# Altium PCB PCB-Mezzanine.PcbDoc (part 2 of 2)
Units mm, origin at the board's own origin, x right, y up, seen from the top; angles counter-clockwise.
Board outline 133.2 x 100 mm, 6 copper layers (Top Layer, Mid-Layer 1, Mid-Layer 2, Mid-Layer 3, Mid-Layer 4, Bottom Layer); 39 components, 252 nets, 1606 pads, 142 vias.
Unrouted connection lines stored in the file: 49.
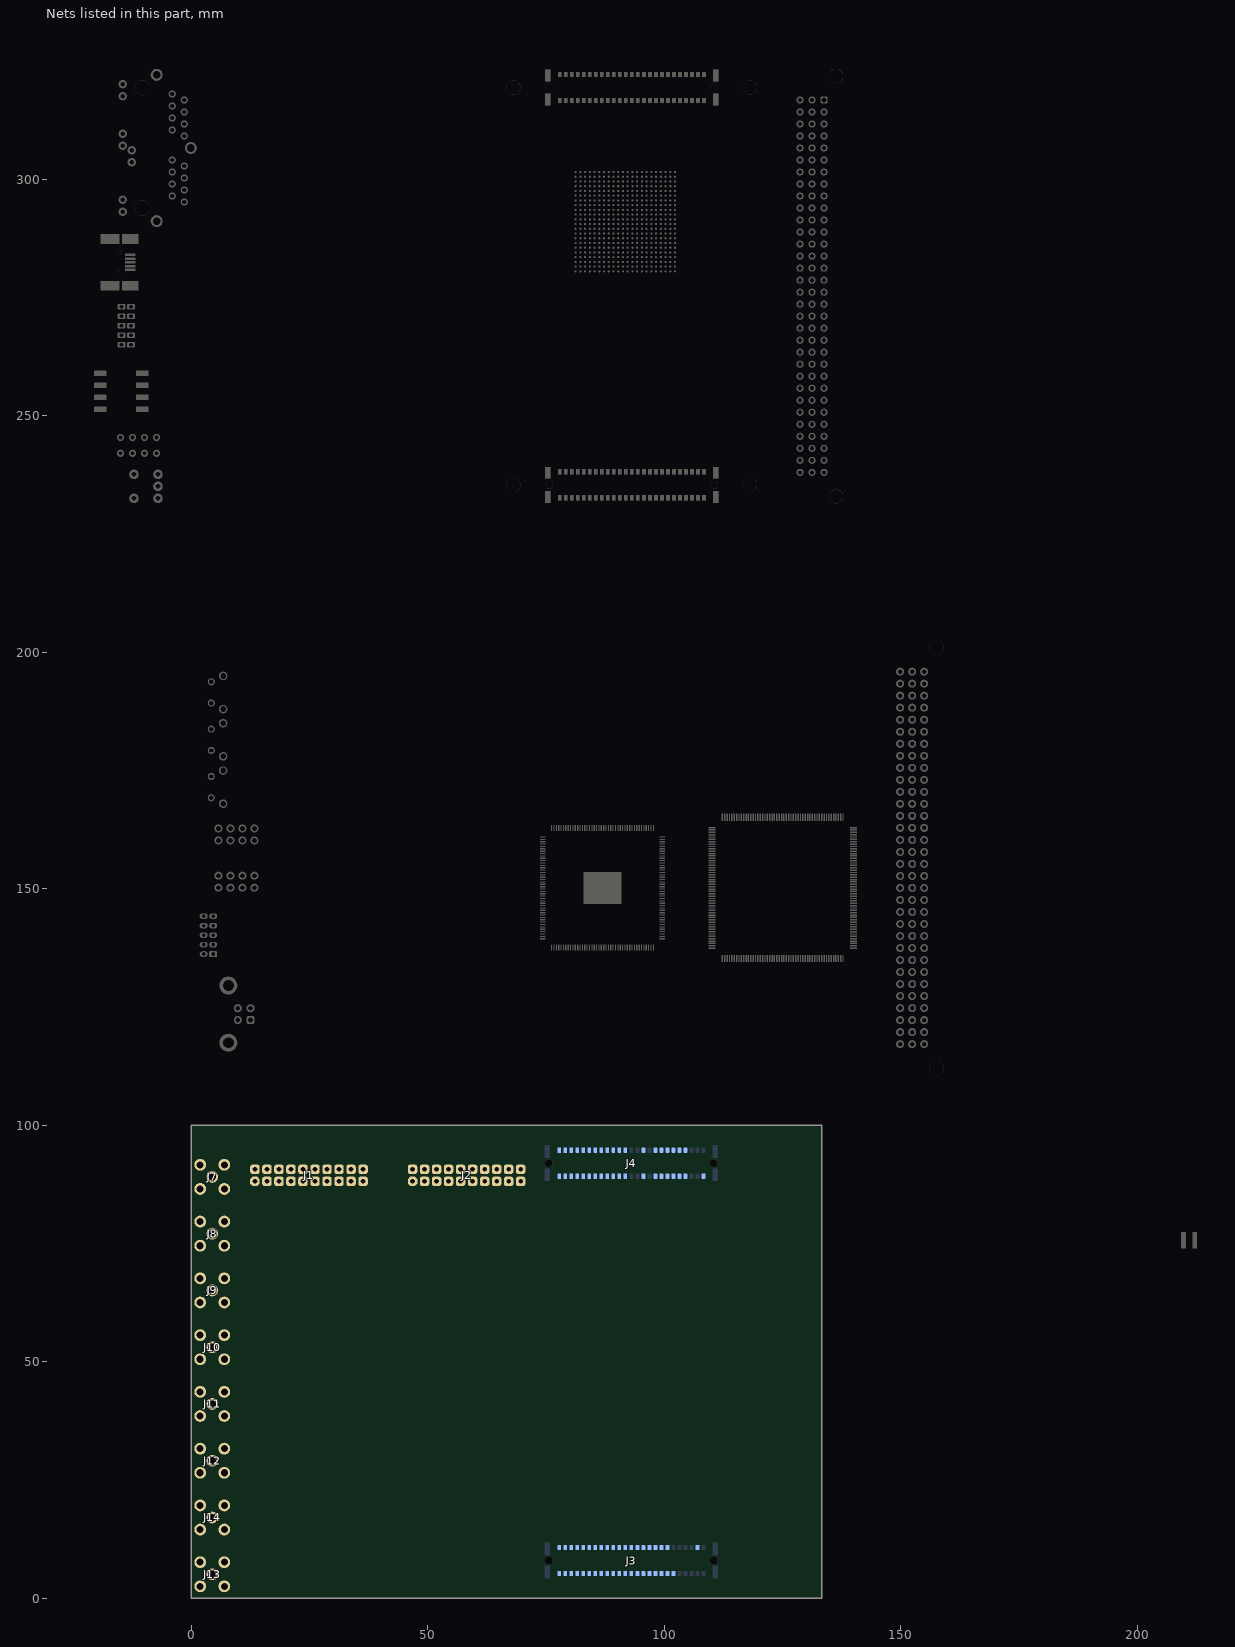
[diagram p6: the nets of this part, all layers, seen from the top]

## Part data
J1 J2: library part FlatCable2x10, "FlatCable2x10", Manufacturer="Wurth Elektronik", Mouser No.=710-61202021621
J2_1 J4_1: "Connecteur Smd serie SMC pas 1.27 ERNI - Distrelec 12 06 39"
J3 J4: "Male 1.27 pitch 2x25 pin connector"
J3_1 J5: "Connecteur Smd serie SMC pas 1.27 ERNI - Distrelec 12 06 42"
J5_1: library part "DIN41612 MALE 3X32 ABC R90", "DIN41612 MALE 3X32 ABC R90", Manufacturer=Harting, Mouser No.=617-09-03-196-6921
J6_1: library part "USB-B-TH-AMPHENOL UE27-BC54-130", "USB-B-TH-AMPHENOL UE27-BC54-130", Manufacturer="Amphenol ICC", Mouser No.=523-UE27-BC54-130
J7 J8 J9 J10 J11 J12 J13 J14: library part "SMA TH RIGHT ANGLE LINX CONSMA002", "SMA TH RIGHT ANGLE LINX CONSMA002", Manufacturer="Linx Technologies", Mouser No.=712-CONSMA002-G
J7_1: library part FlatCable2x5, "FlatCable2x5", Manufacturer="Amphenol FCI", Mouser No.=649-98464-G6110ULF
J9_1: "Integrated connector modules 10/100 base-TX belMag with LEDs .  Reselec N° 0810-1X1T-03"
J10_1: "Farnell no 1125-348 / Molex SD-67503-010"
LD2: "LED Schurter - Distrelec 25 09 08..."
LD4 LD5: library part "LED Dialight 568-0721-111F", "LED Dialight 568-0721-111F", Manufacturer=Dialight, Mouser No.=645-568-0721-111F
S1: "ITW Switches JPM 1990-0101 / Distrelec 20 15 40"
S2 S3 S4: library part "Push Button 2Pins", "Push Button, 2 pins", Manufacturer="TE Connectivity / Alcoswitch", Mouser No.=506-FSMRA4JH04
SW1: "Dip switch smd 4 poles - Thomas & Betts - Distrelec 21 04 21"
U1_1: library part TMS320F28377S-176P, "TMS320F28377S-176P", Manufacturer="Texas Instruments", Mouser No.=595-MS320F28377SPTPT
U8_1: library part XC2C256-PQFP208, "XC2C256 CoolRunner-II CPLD", Manufacturer=Xilinx, Digikey No.=122-1411-ND

## Via types
v1: diameter 0.55, hole 0.15, Top Layer to Bottom Layer, 100 vias
v2: diameter 0.7, hole 0.3, Top Layer to Bottom Layer, tented both sides, 42 vias

## Nets (pads, with @x,y where several pads share a name; then routed paths per layer and width w, separated by ;. In a path a pad name is that pad's centre, name@x,y a point inside that pad or via, vN(x,y) a via of type N, cw(c..) or ccw(c..) an arc to the next point about the centre after c; other vN are vias at no path point)
3VREFF: 
+3V3_A: 
+3V3_D: J3.a7 J3.b7 J4.a1 J4.b1
+5V: J3.a1 J3.b1 J4.a25
\S\P\I\A\_\S\T\E\: J4.a2
\S\P\I\B\_\S\T\E\: J4.b3
\S\P\I\C\_\S\T\E\: J4.a11
\S\P\I\C\_\S\T\E\_\+\: 
\S\P\I\C\_\S\T\E\_\-\: 
ADC_CH0: 
ADC_CH0_CS: J3.a11
ADC_CH0_SDO: J3.a2
ADC_CH1: 
ADC_CH1_CS: J3.b11
ADC_CH1_SDO: J3.b2
ADC_CH2: 
ADC_CH2_CS: J3.a12
ADC_CH2_SDO: J3.a3
ADC_CH3: 
ADC_CH3_CS: J3.b12
ADC_CH3_SDO: J3.b3
ADC_CH4: 
ADC_CH4_CS: J3.a13
ADC_CH4_SDO: J3.a4
ADC_CH5: 
ADC_CH5_CS: J3.b13
ADC_CH5_SDO: J3.b4
ADC_CH6: 
ADC_CH6_CS: J3.a14
ADC_CH6_SDO: J3.a5
ADC_CH7: 
ADC_CH7_CS: J3.b14
ADC_CH7_SDO: J3.b5
ADC_CH8: 
ADC_CH8_CS: J3.a15
ADC_CH8_SDO: J3.a6
ADC_CH9: 
ADC_CH9_CS: J3.b15
ADC_CH9_SDO: J3.b6
ADC_CH10: 
ADC_CH10_CS: J3.a16
ADC_CH10_SDO: J4.a18
ADC_CH11: 
ADC_CH11_CS: J3.b16
ADC_CH11_SDO: J4.b18
ADC_CH12: 
ADC_CH12_CS: J3.a17
ADC_CH12_SDO: J4.a19
ADC_CH13: 
ADC_CH13_CS: J3.b17
ADC_CH13_SDO: J4.b19
ADC_CH14: 
ADC_CH14_CS: J3.a18
ADC_CH14_SDO: J4.a20
ADC_CH15: 
ADC_CH15_CS: J3.b18
ADC_CH15_SDO: J4.b20
ADC_CH16: 
ADC_CH16_CS: J3.a8
ADC_CH16_SDO: J4.a21
ADC_CH17: 
ADC_CH17_CS: J3.b8
ADC_CH17_SDO: J4.b21
ADC_CH18: 
ADC_CH18_CS: J3.a9
ADC_CH18_SDO: J4.a22
ADC_CH19: 
ADC_CH19_CS: J3.b9
ADC_CH19_SDO: J4.b22
ADC_SCLK: J3.a20
DAC_A: 
DAC_B: 
DAC_C: 
DAC_D: 
DAC_E: 
DAC_F: 
DAC_G: 
DAC_H: 
DAC_OUT_A: J7.1
DAC_OUT_B: J8.1
DAC_OUT_C: J9.1
DAC_OUT_D: J10.1
DAC_OUT_E: J11.1
DAC_OUT_F: J12.1
DAC_OUT_G: J13.1
DAC_OUT_H: J14.1
GND_A: 
GND_D: J3.a10 J3.a19 J3.b10 J3.b19 J3.b24 J4.a5 J4.a12 J4.a15 J4.a17 J4.b5 J4.b12 J4.b15 J4.b17 J7.2 J8.2 J9.2 J10.2 J11.2 J12.2 J13.2 J14.2
MEAS_0_N: J1.1
MEAS_0_P: J1.2
MEAS_1_N: J1.3
MEAS_1_P: J1.4
MEAS_2_N: J1.5
MEAS_2_P: J1.6
MEAS_3_N: J1.7
MEAS_3_P: J1.8
MEAS_4_N: J1.9
MEAS_4_P: J1.10
MEAS_5_N: J1.11
MEAS_5_P: J1.12
MEAS_6_N: J1.13
MEAS_6_P: J1.14
MEAS_7_N: J1.15
MEAS_7_P: J1.16
MEAS_8_N: J1.17
MEAS_8_P: J1.18
MEAS_9_N: J1.19
MEAS_9_P: J1.20
MEAS_10_N: J2.1
MEAS_10_P: J2.2
MEAS_11_N: J2.3
MEAS_11_P: J2.4
MEAS_12_N: J2.5
MEAS_12_P: J2.6
MEAS_13_N: J2.7
MEAS_13_P: J2.8
MEAS_14_N: J2.9
MEAS_14_P: J2.10
MEAS_15_N: J2.11
MEAS_15_P: J2.12
MEAS_16_N: J2.13
MEAS_16_P: J2.14
MEAS_17_N: J2.15
MEAS_17_P: J2.16
MEAS_18_N: J2.17
MEAS_18_P: J2.18
MEAS_19_N: J2.19
MEAS_19_P: J2.20
NetC1_1: 
NetC1_2: 
NetC2_1: 
NetC2_2: 
NetC3_1: 
NetC3_2: 
NetC7_2: 
NetC8_2: 
NetC9_2: 
NetC10_1: 
NetC10_2: 
NetC11_1: 
NetC11_2: 
NetC12_1: 
NetC12_2: 
NetC16_2: 
NetC17_2: 
NetC18_2: 
NetC19_1: 
NetC19_2: 
NetC20_1: 
NetC20_2: 
NetC21_1: 
NetC21_2: 
NetC25_2: 
NetC26_2: 
NetC27_2: 
NetC28_1: 
NetC28_2: 
NetC29_1: 
NetC29_2: 
NetC30_1: 
NetC30_2: 
NetC34_2: 
NetC35_2: 
NetC36_2: 
NetC40_1: 
NetC40_2: 
NetC41_1: 
NetC41_2: 
NetC44_2: 
NetC45_2: 
NetC46_1: 
NetC46_2: 
NetC47_1: 
NetC47_2: 
NetC51_2: 
NetC52_2: 
NetC54_1: 
NetC54_2: 
NetC55_1: 
NetC55_2: 
NetC58_2: 
NetC59_2: 
NetC60_1: 
NetC60_2: 
NetC61_1: 
NetC61_2: 
NetC64_2: 
NetC65_2: 
NetC109_1: 
NetC110_2: 
NetC112_1: 
NetC113_2: 
NetC115_2: 
NetC116_1: 
NetC118_2: 
NetC119_1: 
NetC120_2: 
NetC121_1: 
NetC122_2: 
NetC123_1: 
NetC124_2: 
NetC126_2: 
NetC128_1: 
NetC130_2: 
NetC131_1: 
NetC132_2: 
NetC136_2: 
NetC140_1: 
NetC140_2: 
NetC141_2: 
NetJP1_2: 
NetJP2_2: 
NetJP3_2: 
NetJP4_2: 
NetJP5_2: 
NetJP6_2: 
NetJP7_2: 
NetJP8_2: 
NetJP9_2: 
NetJP10_2: 
NetJP11_2: 
NetJP12_2: 
NetJP13_2: 
NetJP14_2: 
NetJP15_2: 
NetJP16_2: 
NetJP17_2: 
NetJP18_2: 
NetJP19_2: 
NetJP20_2: 
NetR142_1: 
NetU35_6: 
REF_1V5: 
SCIC_RX: J4.a10
SCIC_TX: J4.b9
Spare_0: J4.a6
Spare_1: J4.b6
Spare_2: J4.a7
Spare_3: J4.b7
Spare_4: J4.a8
Spare_5: J4.b8
Spare_6: J4.a9
SPIA_CLK: J4.a3
SPIA_SIMO: J4.b2
SPIB_CLK: J4.b4
SPIB_SIMO: J4.a4
SPIC_CLK: J4.b10
SPIC_CLK_+: 
SPIC_CLK_-: 
SPIC_SIMO: J4.b11
SPIC_SIMO_+: 
SPIC_SIMO_-: 
pads on no net: 1.1 2.1 3.1 4.1 Designator24.1 Designator24.2 J1_1.1 J1_1.2 J1_1.3 J1_1.4 J1_1.5 J1_1.6 J1_1.7 J1_1.8 J1_1.9 J1_1.10 J2_1.51 J2_1.52 J2_1.53 J2_1.54 J2_1.55 J2_1.56 J2_1.a1 J2_1.a2 J2_1.a3 J2_1.a4 J2_1.a5 J2_1.a6 J2_1.a7 J2_1.a8 J2_1.a9 J2_1.a10 J2_1.a11 J2_1.a12 J2_1.a13 J2_1.a14 J2_1.a15 J2_1.a16 J2_1.a17 J2_1.a18 J2_1.a19 J2_1.a20 J2_1.a21 J2_1.a22 J2_1.a23 J2_1.a24 J2_1.a25 J2_1.b1 J2_1.b2 J2_1.b3 J2_1.b4 J2_1.b5 J2_1.b6 J2_1.b7 J2_1.b8 J2_1.b9 J2_1.b10 J2_1.b11 J2_1.b12 J2_1.b13 J2_1.b14 J2_1.b15 J2_1.b16 J2_1.b17 J2_1.b18 J2_1.b19 J2_1.b20 J2_1.b21 J2_1.b22 J2_1.b23 J2_1.b24 J2_1.b25 J3.0 J3.a21 J3.a22 J3.a23 J3.a24 J3.a25 J3.b20 J3.b21 J3.b22 J3.b23 J3.b25 J3_1.51 J3_1.52 J3_1.53 J3_1.54 J3_1.55 J3_1.56 J3_1.a1 J3_1.a2 J3_1.a3 J3_1.a4 J3_1.a5 J3_1.a6 J3_1.a7 J3_1.a8 J3_1.a9 J3_1.a10 J3_1.a11 J3_1.a12 J3_1.a13 J3_1.a14 J3_1.a15 J3_1.a16 J3_1.a17 J3_1.a18 J3_1.a19 J3_1.a20 J3_1.a21 J3_1.a22 J3_1.a23 J3_1.a24 J3_1.a25 J3_1.b1 J3_1.b2 J3_1.b3 J3_1.b4 J3_1.b5 J3_1.b6 J3_1.b7 J3_1.b8 J3_1.b9 J3_1.b10 J3_1.b11 J3_1.b12 J3_1.b13 J3_1.b14 J3_1.b15 J3_1.b16 J3_1.b17 J3_1.b18 J3_1.b19 J3_1.b20 J3_1.b21 J3_1.b22 J3_1.b23 J3_1.b24 J3_1.b25 J4.0 J4.a13 J4.a14 J4.a16 J4.a23 J4.a24 J4.b13 J4.b14 J4.b16 J4.b23 J4.b24 J4.b25 J4_1.51 J4_1.52 J4_1.53 J4_1.54 J4_1.55 J4_1.56 J4_1.a1 J4_1.a2 J4_1.a3 J4_1.a4 J4_1.a5 J4_1.a6 J4_1.a7 J4_1.a8 J4_1.a9 J4_1.a10 J4_1.a11 J4_1.a12 J4_1.a13 J4_1.a14 J4_1.a15 J4_1.a16 J4_1.a17 J4_1.a18 J4_1.a19 J4_1.a20 J4_1.a21 J4_1.a22 J4_1.a23 J4_1.a24 J4_1.a25 J4_1.b1 J4_1.b2 J4_1.b3 J4_1.b4 J4_1.b5 J4_1.b6 J4_1.b7 J4_1.b8 J4_1.b9 J4_1.b10 J4_1.b11 J4_1.b12 J4_1.b13 J4_1.b14 J4_1.b15 J4_1.b16 J4_1.b17 J4_1.b18 J4_1.b19 J4_1.b20 J4_1.b21 J4_1.b22 J4_1.b23 J4_1.b24 J4_1.b25 J5.51 J5.52 J5.53 J5.54 J5.55 J5.56 J5.a1 J5.a2 J5.a3 J5.a4 J5.a5 J5.a6 J5.a7 J5.a8 J5.a9 J5.a10 J5.a11 J5.a12 J5.a13 J5.a14 J5.a15 J5.a16 J5.a17 J5.a18 J5.a19 J5.a20 J5.a21 J5.a22 J5.a23 J5.a24 J5.a25 J5.b1 J5.b2 J5.b3 J5.b4 J5.b5 J5.b6 J5.b7 J5.b8 J5.b9 J5.b10 J5.b11 J5.b12 J5.b13 J5.b14 J5.b15 J5.b16 J5.b17 J5.b18 J5.b19 J5.b20 J5.b21 J5.b22 J5.b23 J5.b24 J5.b25 J5_1.0 J5_1.A1 J5_1.A2 J5_1.A3 J5_1.A4 J5_1.A5 J5_1.A6 J5_1.A7 J5_1.A8 J5_1.A9 J5_1.A10 J5_1.A11 J5_1.A12 J5_1.A13 J5_1.A14 J5_1.A15 J5_1.A16 J5_1.A17 J5_1.A18 J5_1.A19 J5_1.A20 J5_1.A21 J5_1.A22 J5_1.A23 J5_1.A24 J5_1.A25 J5_1.A26 J5_1.A27 J5_1.A28 J5_1.A29 J5_1.A30 J5_1.A31 J5_1.A32 J5_1.B1 J5_1.B2 J5_1.B3 J5_1.B4 J5_1.B5 J5_1.B6 J5_1.B7 J5_1.B8 J5_1.B9 J5_1.B10 J5_1.B11 J5_1.B12 J5_1.B13 J5_1.B14 J5_1.B15 J5_1.B16 J5_1.B17 J5_1.B18 J5_1.B19 J5_1.B20 J5_1.B21 J5_1.B22 J5_1.B23 J5_1.B24 J5_1.B25 J5_1.B26 J5_1.B27 J5_1.B28 J5_1.B29 J5_1.B30 J5_1.B31 J5_1.B32 J5_1.C1 J5_1.C2 J5_1.C3 J5_1.C4 J5_1.C5 J5_1.C6 J5_1.C7 J5_1.C8 J5_1.C9 J5_1.C10 J5_1.C11 J5_1.C12 J5_1.C13 J5_1.C14 J5_1.C15 J5_1.C16 J5_1.C17 J5_1.C18 J5_1.C19 J5_1.C20 J5_1.C21 J5_1.C22 J5_1.C23 J5_1.C24 J5_1.C25 J5_1.C26 J5_1.C27 J5_1.C28 J5_1.C29 J5_1.C30 J5_1.C31 J5_1.C32 J6_1.1 J6_1.2 J6_1.3 J6_1.4 J6_1.5 J6_1.6 J7_1.1 J7_1.2 J7_1.3 J7_1.4 J7_1.5 J7_1.6 J7_1.7 J7_1.8 J7_1.9 J7_1.10 J8_1.1a J8_1.1b J8_1.1c J8_1.2a J8_1.2b J8_1.2c J8_1.3a J8_1.3b J8_1.3c J8_1.4a J8_1.4b J8_1.4c J8_1.5a J8_1.5b J8_1.5c J8_1.6a J8_1.6b J8_1.6c J8_1.7a J8_1.7b J8_1.7c J8_1.8a J8_1.8b J8_1.8c J8_1.9a J8_1.9b J8_1.9c J8_1.10a J8_1.10b J8_1.10c J8_1.11a J8_1.11b J8_1.11c J8_1.12a J8_1.12b J8_1.12c J8_1.13a J8_1.13b J8_1.13c J8_1.14a J8_1.14b J8_1.14c J8_1.15a J8_1.15b J8_1.15c J8_1.16a J8_1.16b J8_1.16c J8_1.17a J8_1.17b J8_1.17c J8_1.18a J8_1.18b J8_1.18c J8_1.19a J8_1.19b J8_1.19c J8_1.20a J8_1.20b J8_1.20c J8_1.21a J8_1.21b J8_1.21c J8_1.22a J8_1.22b J8_1.22c J8_1.23a J8_1.23b J8_1.23c J8_1.24a J8_1.24b J8_1.24c J8_1.25a J8_1.25b J8_1.25c J8_1.26a J8_1.26b J8_1.26c J8_1.27a J8_1.27b J8_1.27c J8_1.28a J8_1.28b J8_1.28c J8_1.29a J8_1.29b J8_1.29c J8_1.30a J8_1.30b J8_1.30c J8_1.31a J8_1.31b J8_1.31c J8_1.32a J8_1.32b J8_1.32c J8_1.97 J8_1.98 J9_1.1 J9_1.2 J9_1.3 J9_1.4 J9_1.5 J9_1.6 J9_1.7 J9_1.8 J9_1.9 J9_1.10 J9_1.11 J9_1.12 J9_1.13 J9_1.14 J9_1.15 J9_1.16 J9_1.17 J9_1.18 J9_1.19 J9_1.20 J9_1.21 J9_1.22 J9_1.23 J9_1.24 J9_1.25 J9_1.26 J9_1.27 J9_1.28 J9_1.29 J10_1.1 J10_1.2 J10_1.3 J10_1.4 J10_1.5 J10_1.6 J10_1.7 J10_1.8 J10_1.9 J10_1.10 J10_1.11 LD2.1 LD2.2 LD2.3 LD2.4 LD2.5 LD2.6 LD2.7 LD2.8 LD4.1 LD4.2 LD4.3 LD4.4 LD4.5 LD4.6 LD4.7 LD4.8 LD5.1 LD5.2 LD5.3 LD5.4 LD5.5 LD5.6 LD5.7 LD5.8 S1.4 S1.5 S1.C S1.NC S1.NO S2.0 S2.1 S2.2 S3.0 S3.1 S3.2 S4.0 S4.1 S4.2 SW1.1 SW1.2 SW1.3 SW1.4 SW1.5 SW1.6 SW1.7 SW1.8 U1_1.0 U1_1.1 U1_1.2 U1_1.3 U1_1.4 U1_1.5 U1_1.6 U1_1.7 U1_1.8 U1_1.9 U1_1.10 U1_1.11 U1_1.12 U1_1.13 U1_1.14 U1_1.15 U1_1.16 U1_1.17 U1_1.18 U1_1.19 U1_1.20 U1_1.21 U1_1.22 U1_1.23 U1_1.24 U1_1.25 U1_1.26 U1_1.27 U1_1.28 U1_1.29 U1_1.30 U1_1.31 U1_1.32 U1_1.33 U1_1.34 U1_1.35 U1_1.36 U1_1.37 U1_1.38 U1_1.39 U1_1.40 U1_1.41 U1_1.42 U1_1.43 U1_1.44 U1_1.45 U1_1.46 U1_1.47 U1_1.48 U1_1.49 U1_1.50 U1_1.51 U1_1.52 U1_1.53 U1_1.54 U1_1.55 U1_1.56 U1_1.57 U1_1.58 U1_1.59 U1_1.60 U1_1.61 U1_1.62 U1_1.63 U1_1.64 U1_1.65 U1_1.66 U1_1.67 U1_1.68 U1_1.69 U1_1.70 U1_1.71 U1_1.72 U1_1.73 U1_1.74 U1_1.75 U1_1.76 U1_1.77 U1_1.78 U1_1.79 U1_1.80 U1_1.81 U1_1.82 U1_1.83 U1_1.84 U1_1.85 U1_1.86 U1_1.87 U1_1.88 U1_1.89 U1_1.90 U1_1.91 U1_1.92 U1_1.93 U1_1.94 U1_1.95 U1_1.96 U1_1.97 U1_1.98 U1_1.99 U1_1.100 U1_1.101 U1_1.102 U1_1.103 U1_1.104 U1_1.105 U1_1.106 U1_1.107 U1_1.108 U1_1.109 U1_1.110 U1_1.111 U1_1.112 U1_1.113 U1_1.114 U1_1.115 U1_1.116 U1_1.117 U1_1.118 U1_1.119 U1_1.120 U1_1.121 U1_1.122 U1_1.123 U1_1.124 U1_1.125 U1_1.126 U1_1.127 U1_1.128 U1_1.129 U1_1.130 U1_1.131 U1_1.132 U1_1.133 U1_1.134 U1_1.135 U1_1.136 U1_1.137 U1_1.138 U1_1.139 U1_1.140 U1_1.141 U1_1.142 U1_1.143 U1_1.144 U1_1.145 U1_1.146 U1_1.147 U1_1.148 U1_1.149 U1_1.150 U1_1.151 U1_1.152 U1_1.153 U1_1.154 U1_1.155 U1_1.156 U1_1.157 U1_1.158 U1_1.159 U1_1.160 U1_1.161 U1_1.162 U1_1.163 U1_1.164 U1_1.165 U1_1.166 U1_1.167 U1_1.168 U1_1.169 U1_1.170 U1_1.171 U1_1.172 U1_1.173 U1_1.174 U1_1.175 U1_1.176 U3.A1 U3.A2 U3.A3 U3.A4 U3.A5 U3.A6 U3.A7 U3.A8 U3.A9 U3.A10 U3.A11 U3.A12 U3.A13 U3.A14 U3.A15 U3.A16 U3.A17 U3.A18 U3.A19 U3.A20 U3.A21 U3.A22 U3.AA1 U3.AA2 U3.AA3 U3.AA4 U3.AA5 U3.AA6 U3.AA7 U3.AA8 U3.AA9 U3.AA10 U3.AA11 U3.AA12 U3.AA13 U3.AA14 U3.AA15 U3.AA16 U3.AA17 U3.AA18 U3.AA19 U3.AA20 U3.AA21 U3.AA22 U3.AB1 U3.AB2 U3.AB3 U3.AB4 U3.AB5 U3.AB6 U3.AB7 U3.AB8 U3.AB9 U3.AB10 U3.AB11 U3.AB12 U3.AB13 U3.AB14 U3.AB15 U3.AB16 U3.AB17 U3.AB18 U3.AB19 U3.AB20 U3.AB21 U3.AB22 U3.B1 U3.B2 U3.B3 U3.B4 U3.B5 U3.B6 U3.B7 U3.B8 U3.B9 U3.B10 U3.B11 U3.B12 U3.B13 U3.B14 U3.B15 U3.B16 U3.B17 U3.B18 U3.B19 U3.B20 U3.B21 U3.B22 U3.C1 U3.C2 U3.C3 U3.C4 U3.C5 U3.C6 U3.C7 U3.C8 U3.C9 U3.C10 U3.C11 U3.C12 U3.C13 U3.C14 U3.C15 U3.C16 U3.C17 U3.C18 U3.C19 U3.C20 U3.C21 U3.C22 U3.D1 U3.D2 U3.D3 U3.D4 U3.D5 U3.D6 U3.D7 U3.D8 U3.D9 U3.D10 U3.D11 U3.D12 U3.D13 U3.D14 U3.D15 U3.D16 U3.D17 U3.D18 U3.D19 U3.D20 U3.D21 U3.D22 U3.E1 U3.E2 U3.E3 U3.E4 U3.E5 U3.E6 U3.E7 U3.E8 U3.E9 U3.E10 U3.E11 U3.E12 U3.E13 U3.E14 U3.E15 U3.E16 U3.E17 U3.E18 U3.E19 U3.E20 U3.E21 U3.E22 U3.F1 U3.F2 U3.F3 U3.F4 U3.F5 U3.F6 U3.F7 U3.F8 U3.F9 U3.F10 U3.F11 U3.F12 U3.F13 U3.F14 U3.F15 U3.F16 U3.F17 U3.F18 U3.F19 U3.F20 U3.F21 U3.F22 U3.G1 U3.G2 U3.G3 U3.G4 U3.G5 U3.G6 U3.G7 U3.G8 U3.G9 U3.G10 U3.G11 U3.G12 U3.G13 U3.G14 U3.G15 U3.G16 U3.G17 U3.G18 U3.G19 U3.G20 U3.G21 U3.G22 U3.H1 U3.H2 U3.H3 U3.H4 U3.H5 U3.H6 U3.H7 U3.H8 U3.H9 U3.H10 U3.H11 U3.H12 U3.H13 U3.H14 U3.H15 U3.H16 U3.H17 U3.H18 U3.H19 U3.H20 U3.H21 U3.H22 U3.J1 U3.J2 U3.J3 U3.J4 U3.J5 U3.J6 U3.J7 U3.J8 U3.J9 U3.J10 U3.J11 U3.J12 U3.J13 U3.J14 U3.J15 U3.J16 U3.J17 U3.J18 U3.J19 U3.J20 U3.J21 U3.J22 U3.K1 U3.K2 U3.K3 U3.K4 U3.K5 U3.K6 U3.K7 U3.K8 U3.K9 U3.K10 U3.K11 U3.K12 U3.K13 U3.K14 U3.K15 U3.K16 U3.K17 U3.K18 U3.K19 U3.K20 U3.K21 U3.K22 U3.L1 U3.L2 U3.L3 U3.L4 U3.L5 U3.L6 U3.L7 U3.L8 U3.L9 U3.L10 U3.L11 U3.L12 U3.L13 U3.L14 U3.L15 U3.L16 U3.L17 U3.L18 U3.L19 U3.L20 U3.L21 U3.L22 U3.M1 U3.M2 U3.M3 U3.M4 U3.M5 U3.M6 U3.M7 U3.M8 U3.M9 U3.M10 U3.M11 U3.M12 U3.M13 U3.M14 U3.M15 U3.M16 U3.M17 U3.M18 U3.M19 U3.M20 U3.M21 U3.M22 U3.N1 U3.N2 U3.N3 U3.N4 U3.N5 U3.N6 U3.N7 U3.N8 U3.N9 U3.N10 U3.N11 U3.N12 U3.N13 U3.N14 U3.N15 U3.N16 U3.N17 U3.N18 U3.N19 U3.N20 U3.N21 U3.N22 U3.P1 U3.P2 U3.P3 U3.P4 U3.P5 U3.P6 U3.P7 U3.P8 U3.P9 U3.P10 U3.P11 U3.P12 U3.P13 U3.P14 U3.P15 U3.P16 U3.P17 U3.P18 U3.P19 U3.P20 U3.P21 U3.P22 U3.R1 U3.R2 U3.R3 U3.R4 U3.R5 U3.R6 U3.R7 U3.R8 U3.R9 U3.R10 U3.R11 U3.R12 U3.R13 U3.R14 U3.R15 U3.R16 U3.R17 U3.R18 U3.R19 U3.R20 U3.R21 U3.R22 U3.T1 U3.T2 U3.T3 U3.T4 U3.T5 U3.T6 U3.T7 U3.T8 U3.T9 U3.T10 U3.T11 U3.T12 U3.T13 U3.T14 U3.T15 U3.T16 U3.T17 U3.T18 U3.T19 U3.T20 U3.T21 U3.T22 U3.U1 U3.U2 U3.U3 U3.U4 U3.U5 U3.U6 U3.U7 U3.U8 U3.U9 U3.U10 U3.U11 U3.U12 U3.U13 U3.U14 U3.U15 U3.U16 U3.U17 U3.U18 U3.U19 U3.U20 U3.U21 U3.U22 U3.V1 U3.V2 U3.V3 U3.V4 U3.V5 U3.V6 U3.V7 U3.V8 U3.V9 U3.V10 U3.V11 U3.V12 U3.V13 U3.V14 U3.V15 U3.V16 U3.V17 U3.V18 U3.V19 U3.V20 U3.V21 U3.V22 U3.W1 U3.W2 U3.W3 U3.W4 U3.W5 U3.W6 U3.W7 U3.W8 U3.W9 U3.W10 U3.W11 U3.W12 U3.W13 U3.W14 U3.W15 U3.W16 U3.W17 U3.W18 U3.W19 U3.W20 U3.W21 U3.W22 U3.Y1 U3.Y2 U3.Y3 U3.Y4 U3.Y5 U3.Y6 U3.Y7 U3.Y8 U3.Y9 U3.Y10 U3.Y11 U3.Y12 U3.Y13 U3.Y14 U3.Y15 U3.Y16 U3.Y17 U3.Y18 U3.Y19 U3.Y20 U3.Y21 U3.Y22 U8_1.1 U8_1.2 U8_1.3 U8_1.4 U8_1.5 U8_1.6 U8_1.7 U8_1.8 U8_1.9 U8_1.10 U8_1.11 U8_1.12 U8_1.13 U8_1.14 U8_1.15 U8_1.16 U8_1.17 U8_1.18 U8_1.19 U8_1.20 U8_1.21 U8_1.22 U8_1.23 U8_1.24 U8_1.25 U8_1.26 U8_1.27 U8_1.28 U8_1.29 U8_1.30 U8_1.31 U8_1.32 U8_1.33 U8_1.34 U8_1.35 U8_1.36 U8_1.37 U8_1.38 U8_1.39 U8_1.40 U8_1.41 U8_1.42 U8_1.43 U8_1.44 U8_1.45 U8_1.46 U8_1.47 U8_1.48 U8_1.49 U8_1.50 U8_1.51 U8_1.52 U8_1.53 U8_1.54 U8_1.55 U8_1.56 U8_1.57 U8_1.58 U8_1.59 U8_1.60 U8_1.61 U8_1.62 U8_1.63 U8_1.64 U8_1.65 U8_1.66 U8_1.67 U8_1.68 U8_1.69 U8_1.70 U8_1.71 U8_1.72 U8_1.73 U8_1.74 U8_1.75 U8_1.76 U8_1.77 U8_1.78 U8_1.79 U8_1.80 U8_1.81 U8_1.82 U8_1.83 U8_1.84 U8_1.85 U8_1.86 U8_1.87 U8_1.88 U8_1.89 U8_1.90 U8_1.91 U8_1.92 U8_1.93 U8_1.94 U8_1.95 U8_1.96 U8_1.97 U8_1.98 U8_1.99 U8_1.100 U8_1.101 U8_1.102 U8_1.103 U8_1.104 U8_1.105 U8_1.106 U8_1.107 U8_1.108 U8_1.109 U8_1.110 U8_1.111 U8_1.112 U8_1.113 U8_1.114 U8_1.115 U8_1.116 U8_1.117 U8_1.118 U8_1.119 U8_1.120 U8_1.121 U8_1.122 U8_1.123 U8_1.124 U8_1.125 U8_1.126 U8_1.127 U8_1.128 U8_1.129 U8_1.130 U8_1.131 U8_1.132 U8_1.133 U8_1.134 U8_1.135 U8_1.136 U8_1.137 U8_1.138 U8_1.139 U8_1.140 U8_1.141 U8_1.142 U8_1.143 U8_1.144 U8_1.145 U8_1.146 U8_1.147 U8_1.148 U8_1.149 U8_1.150 U8_1.151 U8_1.152 U8_1.153 U8_1.154 U8_1.155 U8_1.156 U8_1.157 U8_1.158 U8_1.159 U8_1.160 U8_1.161 U8_1.162 U8_1.163 U8_1.164 U8_1.165 U8_1.166 U8_1.167 U8_1.168 U8_1.169 U8_1.170 U8_1.171 U8_1.172 U8_1.173 U8_1.174 U8_1.175 U8_1.176 U8_1.177 U8_1.178 U8_1.179 U8_1.180 U8_1.181 U8_1.182 U8_1.183 U8_1.184 U8_1.185 U8_1.186 U8_1.187 U8_1.188 U8_1.189 U8_1.190 U8_1.191 U8_1.192 U8_1.193 U8_1.194 U8_1.195 U8_1.196 U8_1.197 U8_1.198 U8_1.199 U8_1.200 U8_1.201 U8_1.202 U8_1.203 U8_1.204 U8_1.205 U8_1.206 U8_1.207 U8_1.208
copper on no net: | length 615.3
  Top Layer w0.15: 77.864,232.65 v1(77.864,233.901) ; v1(77.864,236.918) 77.864,238.15 ; 77.864,316.648 v1(77.864,317.88) ; v1(77.864,320.896) 77.864,322.148 ; 79.134,232.65 v1(79.134,233.901) ; v1(79.134,236.918) 79.134,238.15 ; 79.134,316.648 v1(79.134,317.88) ; v1(79.134,320.896) 79.134,322.148 ; 80.404,232.65 v1(80.404,233.901) ; v1(80.404,236.918) 80.404,238.15 ; 80.404,316.648 v1(80.404,317.88) ; v1(80.404,320.896) 80.404,322.148 ; 81.674,232.65 v1(81.674,233.901) ; v1(81.674,236.918) 81.674,238.15 ; 81.674,316.648 v1(81.674,317.88) ; v1(81.674,320.896) 81.674,322.148 ; 82.944,232.65 v1(82.944,233.901) ; v1(82.944,236.918) 82.944,238.15 ; 82.944,316.648 v1(82.944,317.88) ; v1(82.944,320.896) 82.944,322.148 ; 84.214,232.65 v1(84.214,233.901) ; v1(84.214,236.918) 84.214,238.15 ; 84.214,316.648 v1(84.214,317.88) ; v1(84.214,320.896) 84.214,322.148 ; 85.484,232.65 v1(85.484,233.901) ; v1(85.484,236.918) 85.484,238.15 ; 85.484,315.269 85.484,316.648 v1(85.484,317.88) ; 85.484,322.148 v1(85.484,320.896) 86.119,320.261 86.119,315.134 ; 86.754,232.65 v1(86.754,233.901) ; v1(86.754,236.918) 86.754,238.15 ; 86.754,316.648 v1(86.754,317.88) ; v1(86.754,320.896) 86.754,322.148 ; 88.024,232.65 v1(88.024,233.901) ; v1(88.024,236.918) 88.024,238.15 ; 88.024,316.648 v1(88.024,317.88) ; v1(88.024,320.896) 88.024,322.148 ; 89.294,232.65 v1(89.294,233.901) ; v1(89.294,236.918) 89.294,238.15 ; 89.294,316.648 v1(89.294,317.88) ; 89.294,322.148 v1(89.294,320.896) 89.929,320.261 ; 90.564,232.65 v1(90.564,233.901) ; v1(90.564,236.918) 90.564,238.15 ; 90.564,316.648 v1(90.564,317.88) ; v1(90.564,320.896) 90.564,322.148 ; 91.834,232.65 v1(91.834,233.901) ; v1(91.834,236.918) 91.834,238.15 ; 91.834,316.648 v1(91.834,317.88) ; v1(91.834,320.896) 91.834,322.148 ; 93.104,232.65 v1(93.104,233.901) ; v1(93.104,236.918) 93.104,238.15 ; 93.104,316.648 v1(93.104,317.88) ; v1(93.104,320.896) 93.104,322.148 ; 94.374,232.65 v1(94.374,233.901) ; v1(94.374,236.918) 94.374,238.15 ; 94.374,316.648 v1(94.374,317.88) ; v1(94.374,320.896) 94.374,322.148 ; 95.644,232.65 v1(95.644,233.901) ; v1(95.644,236.918) 95.644,238.15 ; 95.644,316.648 v1(95.644,317.88) ; v1(95.644,320.896) 95.644,322.148 ; 96.914,232.65 v1(96.914,233.901) ; v1(96.914,236.918) 96.914,238.15 ; 96.914,316.648 v1(96.914,317.88) ; v1(96.914,320.896) 96.914,322.148 ; 98.184,232.65 v1(98.184,233.901) ; v1(98.184,236.918) 98.184,238.15 ; 98.184,316.648 v1(98.184,317.88) ; v1(98.184,320.896) 98.184,322.148 ; 99.454,232.65 v1(99.454,233.901) ; v1(99.454,236.918) 99.454,238.15 ; 99.454,316.648 v1(99.454,317.88) ; v1(99.454,320.896) 99.454,322.148 ; 100.724,232.65 v1(100.724,233.901) ; v1(100.724,236.918) 100.724,238.15 ; 100.724,316.648 v1(100.724,317.88) ; v1(100.724,320.896) 100.724,322.148 ; 101.994,232.65 v1(101.994,233.901) 102.629,234.536 102.629,238.981 ; v1(101.994,236.918) 101.994,238.15 ; 101.994,316.648 v1(101.994,317.88) ; v1(101.994,320.896) 101.994,322.148 ; 103.264,232.65 v1(103.264,233.901) ; v1(103.264,236.918) 103.264,238.15 103.264,238.981 ; 103.264,316.648 v1(103.264,317.88) ; v1(103.264,320.896) 103.264,322.148 ; 104.534,232.65 v1(104.534,233.901) 105.169,234.536 105.169,238.981 ; v1(104.534,236.918) 104.534,238.15 ; 104.534,316.648 v1(104.534,317.88) ; v1(104.534,320.896) 104.534,322.148 ; 105.804,232.65 v1(105.804,233.901) ; v1(105.804,236.918) 105.804,238.15 105.804,238.981 ; 105.804,316.648 v1(105.804,317.88) ; 105.804,322.148 v1(105.804,320.896) 106.439,320.261 ; 107.074,232.65 v1(107.074,233.901) ; v1(107.074,236.918) 107.074,238.15 ; 107.074,316.648 v1(107.074,317.88) ; v1(107.074,320.896) 107.074,322.148 ; 108.344,232.65 v1(108.344,233.901) 108.979,234.536 ; v1(108.344,236.918) 108.344,238.15 ; 108.344,316.648 v1(108.344,317.88) ; v1(108.344,320.896) 108.344,322.148
  Mid-Layer 1 w0.15: v1(79.134,236.918) 79.134,237.394 ; 79.134,315.816 v1(79.134,317.88) ; 79.769,237.394 79.769,234.536 v1(80.404,233.901) ; v1(80.404,236.918) 80.404,237.394 ; 80.404,315.816 v1(80.404,317.88) ; 81.039,237.394 81.039,234.536 v1(81.674,233.901) ; v1(81.674,236.918) 81.674,237.394 ; 81.674,315.816 v1(81.674,317.88) ; v1(81.674,320.896) 82.309,320.261 82.309,315.816 ; v1(82.944,233.901) 82.309,234.536 82.309,237.394 84.444,239.529 101.224,239.529 ; v1(82.944,236.918) 82.944,237.394 84.579,239.029 101.224,239.029 ; v1(84.214,233.901) 83.579,234.536 83.579,237.394 84.714,238.529 101.224,238.529 ; v1(84.214,236.918) 84.214,237.394 84.849,238.029 101.224,238.029 ; v1(84.214,317.88) 84.214,315.816 85.001,315.029 86.224,315.029 ; v1(84.214,320.896) 84.849,320.261 84.849,315.816 85.136,315.529 86.224,315.529 ; v1(93.104,320.896) 93.739,320.261 ; v1(96.914,320.896) 97.549,320.261 ; v1(101.994,236.918) 101.994,237.394 102.629,238.029 104.224,238.029 ; v1(104.534,236.918) 104.534,237.839 ; v1(104.534,320.896) 105.169,320.261 ; v1(105.804,233.901) 106.439,234.536 106.439,239.244 ; v1(107.074,233.901) 107.709,234.536 ; v1(107.074,320.896) 107.709,320.261
  Mid-Layer 2 w0.15: v1(79.134,233.901) 79.769,234.536 79.769,237.394 79.134,238.029 ; 84.984,238.529 86.119,237.394 86.119,234.536 v1(86.754,233.901) ; 85.119,239.029 86.754,237.394 v1(86.754,236.918) ; 85.254,239.529 87.389,237.394 87.389,234.536 v1(88.024,233.901) ; 86.754,314.999 v1(86.754,317.88) ; v1(86.754,320.896) 87.389,320.261 87.389,315.364 ; v1(88.024,236.918) 88.024,237.394 ; 99.454,315.816 v1(99.454,317.88) ; v1(99.454,320.896) 99.454,321.214 99.771,321.531 103.581,321.531 103.899,321.214 103.899,315.816 ; 100.724,315.816 v1(100.724,317.88) ; v1(100.724,320.896) 101.359,320.261 101.359,315.816 ; 101.994,315.816 v1(101.994,317.88) ; v1(101.994,320.896) 102.629,320.261 102.629,315.816 ; 102.629,237.394 102.629,234.536 v1(103.264,233.901)
  Mid-Layer 2 w1: v1(77.864,236.918) v1(77.864,233.901) 77.864,231.529 111.724,231.529
  Mid-Layer 3 w0.15: v1(79.134,320.896) 79.769,320.261 79.769,315.816 ; v1(80.404,320.896) 81.039,320.261 81.039,315.816 ; v1(88.024,320.896) 88.659,320.261 ; v1(90.564,320.896) 91.199,320.261 ; v1(103.264,320.896) 103.899,320.261 103.899,315.204 ; v1(108.344,236.918) 108.344,237.394
  Mid-Layer 4 w0.15: 89.929,237.394 89.929,234.536 v1(90.564,233.901) ; 90.224,315.029 109.224,315.029 ; 90.224,315.529 108.691,315.529 108.979,315.816 108.979,320.261 v1(108.344,320.896) ; v1(90.564,236.918) 90.564,237.394 ; 91.199,237.394 91.199,234.536 v1(91.834,233.901) ; v1(91.834,236.918) 91.834,237.394 ; 92.469,237.394 92.469,234.536 v1(93.104,233.901) ; v1(93.104,236.918) 93.104,237.394 ; 93.739,237.394 93.739,234.536 v1(94.374,233.901) ; v1(94.374,236.918) 94.374,237.394 ; 95.009,237.394 95.009,234.536 v1(95.644,233.901) ; v1(95.644,236.918) 95.644,237.394 ; 96.279,237.394 96.279,234.536 v1(96.914,233.901) ; v1(96.914,236.918) 96.914,237.394 ; v1(98.184,233.901) 97.549,234.536 97.549,237.394 99.684,239.529 103.224,239.529 ; v1(98.184,236.918) 98.184,237.394 99.819,239.029 103.224,239.029 ; v1(99.454,233.901) 98.819,234.536 98.819,237.394 99.954,238.529 103.224,238.529 ; v1(99.454,236.918) 99.454,237.394 100.089,238.029 103.224,238.029
  Bottom Layer w0.15: 77.864,232.65 v1(77.864,233.901) ; v1(77.864,236.918) 77.864,238.15 ; 77.864,316.648 v1(77.864,317.88) ; v1(77.864,320.896) 77.864,322.148 ; 79.134,232.65 v1(79.134,233.901) ; v1(79.134,236.918) 79.134,238.15 ; 79.134,316.648 v1(79.134,317.88) ; v1(79.134,320.896) 79.134,322.148 ; 80.404,232.65 v1(80.404,233.901) ; v1(80.404,236.918) 80.404,238.15 ; 80.404,316.648 v1(80.404,317.88) ; v1(80.404,320.896) 80.404,322.148 ; 81.674,232.65 v1(81.674,233.901) ; v1(81.674,236.918) 81.674,238.15 ; 81.674,316.648 v1(81.674,317.88) ; v1(81.674,320.896) 81.674,322.148 ; 82.944,232.65 v1(82.944,233.901) ; v1(82.944,236.918) 82.944,238.15 ; 82.944,316.648 v1(82.944,317.88) ; v1(82.944,320.896) 82.944,322.148 ; 84.214,232.65 v1(84.214,233.901) ; v1(84.214,236.918) 84.214,238.15 ; 84.214,316.648 v1(84.214,317.88) ; v1(84.214,320.896) 84.214,322.148 ; 85.484,232.65 v1(85.484,233.901) ; v1(85.484,236.918) 85.484,238.15 ; 85.484,316.648 v1(85.484,317.88) ; v1(85.484,320.896) 85.484,322.148 ; 86.754,232.65 v1(86.754,233.901) ; v1(86.754,236.918) 86.754,238.15 ; 86.754,316.648 v1(86.754,317.88) ; v1(86.754,320.896) 86.754,322.148 ; 88.024,232.65 v1(88.024,233.901) ; v1(88.024,236.918) 88.024,238.15 ; 88.024,316.648 v1(88.024,317.88) ; v1(88.024,320.896) 88.024,322.148 ; 89.294,232.65 v1(89.294,233.901) ; v1(89.294,236.918) 89.294,238.15 ; 89.294,316.648 v1(89.294,317.88) ; v1(89.294,320.896) 89.294,322.148 ; 90.564,232.65 v1(90.564,233.901) ; v1(90.564,236.918) 90.564,238.15 ; 90.564,316.648 v1(90.564,317.88) ; v1(90.564,320.896) 90.564,322.148 ; 91.834,232.65 v1(91.834,233.901) ; v1(91.834,236.918) 91.834,238.15 ; 91.834,316.648 v1(91.834,317.88) ; v1(91.834,320.896) 91.834,322.148 ; 93.104,232.65 v1(93.104,233.901) ; v1(93.104,236.918) 93.104,238.15 ; 93.104,316.648 v1(93.104,317.88) ; v1(93.104,320.896) 93.104,322.148 ; 94.374,232.65 v1(94.374,233.901) ; v1(94.374,236.918) 94.374,238.15 ; 94.374,316.648 v1(94.374,317.88) ; v1(94.374,320.896) 94.374,322.148 ; 95.644,232.65 v1(95.644,233.901) ; v1(95.644,236.918) 95.644,238.15 ; 95.644,316.648 v1(95.644,317.88) ; v1(95.644,320.896) 95.644,322.148 ; 96.914,232.65 v1(96.914,233.901) ; v1(96.914,236.918) 96.914,238.15 ; 96.914,316.648 v1(96.914,317.88) ; v1(96.914,320.896) 96.914,322.148 ; 98.184,232.65 v1(98.184,233.901) ; v1(98.184,236.918) 98.184,238.15 ; 98.184,316.648 v1(98.184,317.88) ; v1(98.184,320.896) 98.184,322.148 ; 99.454,232.65 v1(99.454,233.901) ; v1(99.454,236.918) 99.454,238.15 ; 99.454,316.648 v1(99.454,317.88) ; v1(99.454,320.896) 99.454,322.148 ; 100.724,232.65 v1(100.724,233.901) ; v1(100.724,236.918) 100.724,238.15 ; 100.724,316.648 v1(100.724,317.88) ; v1(100.724,320.896) 100.724,322.148 ; 101.994,232.65 v1(101.994,233.901) ; v1(101.994,236.918) 101.994,238.15 ; 101.994,316.648 v1(101.994,317.88) ; v1(101.994,320.896) 101.994,322.148 ; 103.264,232.65 v1(103.264,233.901) ; v1(103.264,236.918) 103.264,238.15 ; 103.264,316.648 v1(103.264,317.88) ; v1(103.264,320.896) 103.264,322.148 ; 104.534,232.65 v1(104.534,233.901) ; v1(104.534,236.918) 104.534,238.15 ; 104.534,316.648 v1(104.534,317.88) ; v1(104.534,320.896) 104.534,322.148 ; 105.804,232.65 v1(105.804,233.901) ; v1(105.804,236.918) 105.804,238.15 ; 105.804,316.648 v1(105.804,317.88) ; v1(105.804,320.896) 105.804,322.148 ; 107.074,232.65 v1(107.074,233.901) ; v1(107.074,236.918) 107.074,238.15 ; 107.074,316.648 v1(107.074,317.88) ; v1(107.074,320.896) 107.074,322.148 ; 108.344,232.65 v1(108.344,233.901) ; v1(108.344,236.918) 108.344,238.15 ; 108.344,316.648 v1(108.344,317.88) ; v1(108.344,320.896) 108.344,322.148
  other v2: 83.6,147.45 84.7,147.45 85.8,147.45 86.9,147.45 88,147.45 89.1,147.45 90.2,147.45 83.6,148.55 84.7,148.55 85.8,148.55 86.9,148.55 88,148.55 89.1,148.55 90.2,148.55 83.6,149.65 84.7,149.65 85.8,149.65 86.9,149.65 88,149.65 89.1,149.65 90.2,149.65 83.6,150.75 84.7,150.75 85.8,150.75 86.9,150.75 88,150.75 89.1,150.75 90.2,150.75 83.6,151.85 84.7,151.85 85.8,151.85 86.9,151.85 88,151.85 89.1,151.85 90.2,151.85 83.6,152.95 84.7,152.95 85.8,152.95 86.9,152.95 88,152.95 89.1,152.95 90.2,152.95

## Keep-outs
Keep-Out Layer:
  lines w0.254: -21.176,227.399 138.824,227.399 138.824,327.399 -21.176,327.399 -21.176,227.399

## Silkscreen, mask and mechanical layers (free items; w line width, h text height)
Mechanical 1:
  lines w0.15: 0,106.5 0,206.5 160,206.5 160,106.5 0,106.5
  lines w0.254: 0,0 133.2,0 133.2,100 0,100 0,0
Mechanical 5:
  text "FPGA RACK" at 10.6,309.4 h5
  text "POETIC PROCESSOR" at 46.6,191.8 h5

## Dimensions
75.654,319.398 to 75.654,235.4 on Mechanical 5
75.55,92 to 75.55,8 on Mechanical 5
0,0 to 0,100 on Mechanical 5
109.8,94.9 to 0,100 on Mechanical 5